# Altium PCB BenchSignalGenerator.PcbDoc (part 3 of 3)
Units mm, origin at the board's own origin, x right, y up, seen from the top; angles counter-clockwise.
Board outline 98.17 x 87.5 mm, 4 copper layers (Top Layer, Ground, 3.3, Bottom Layer), stack 0.603 mm thick; 75 components, 70 nets, 305 pads, 51 vias.
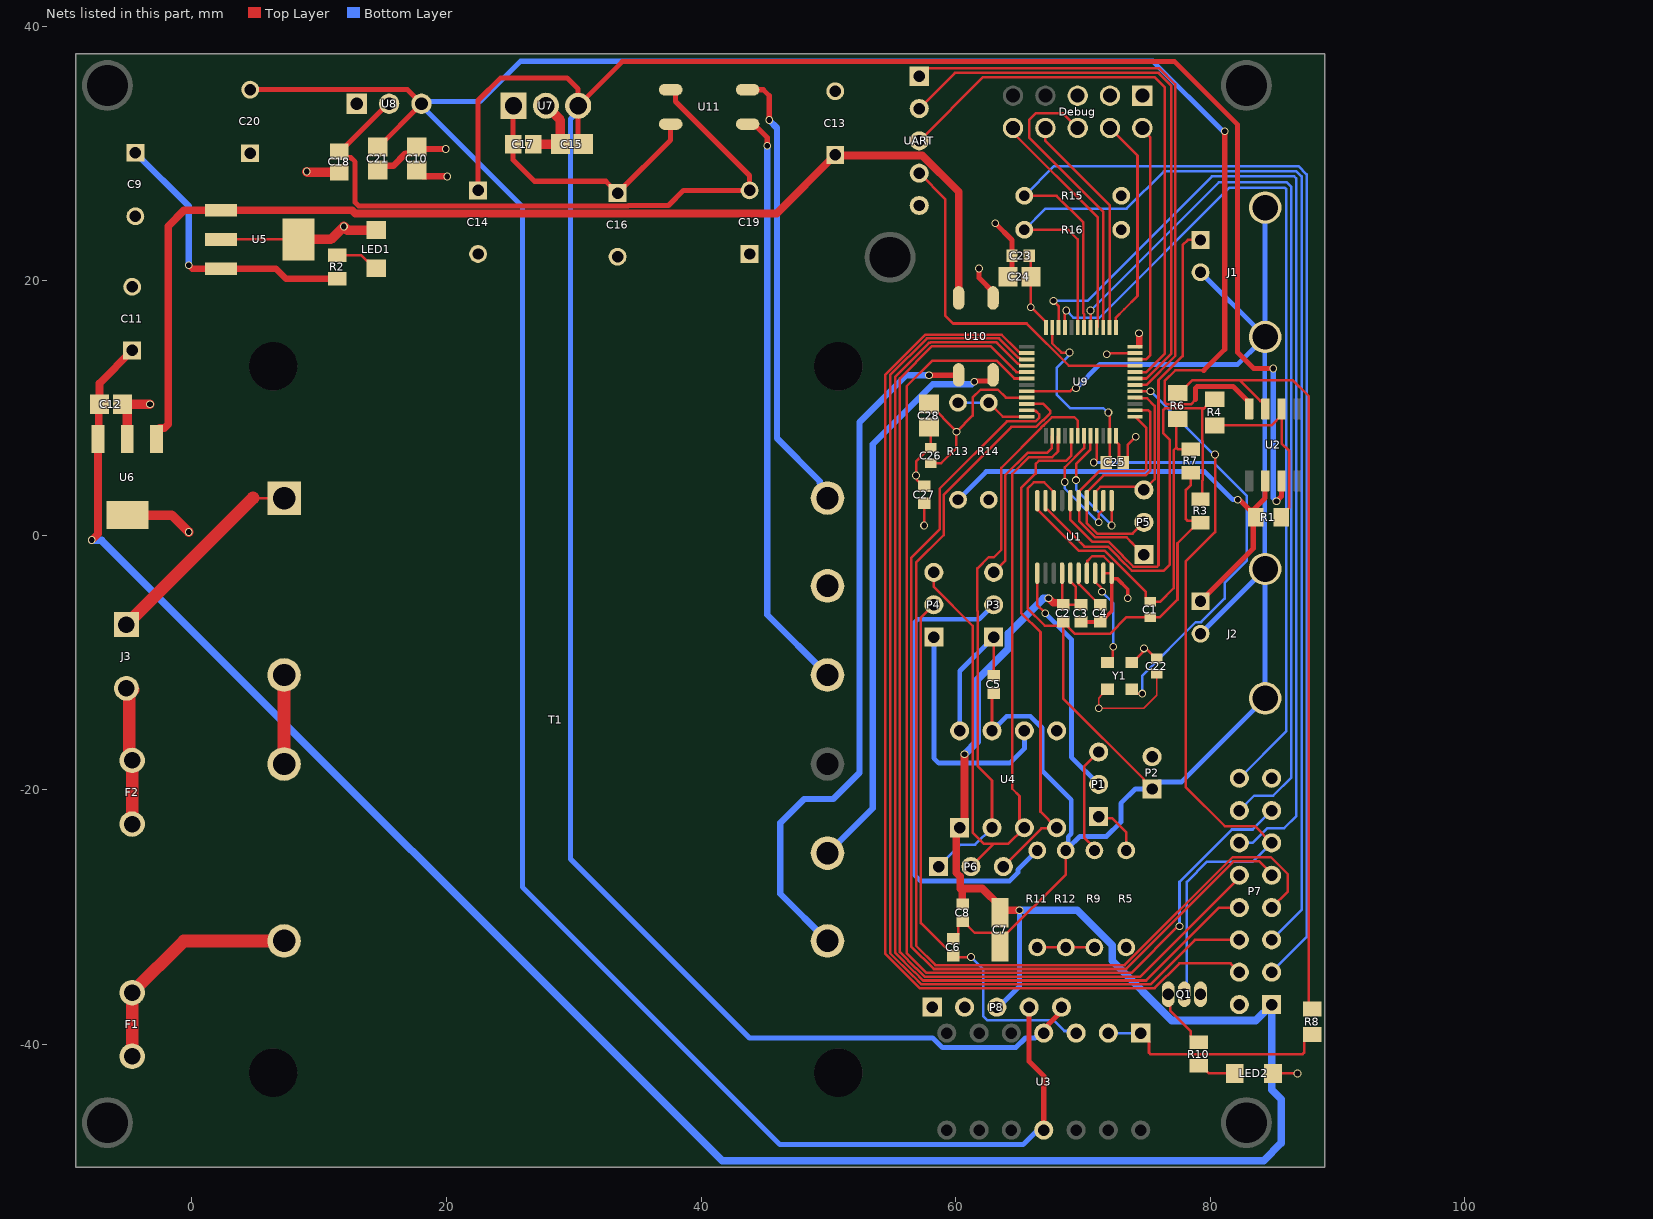
[diagram p4: the nets of this part, all layers, seen from the top]

## Via types
v1: diameter 0.61, hole 0.45, Top Layer to Bottom Layer, 51 vias

## Nets (pads, with @x,y where several pads share a name; then routed paths per layer and width w, separated by ;. In a path a pad name is that pad's centre, name@x,y a point inside that pad or via, vN(x,y) a via of type N, cw(c..) or ccw(c..) an arc to the next point about the centre after c; other vN are vias at no path point)
+3.3: C9.1 C10.2 C22.1 C23.1 C24.1 C25.2 C26.1 C27.2 C28.2 Debug.1 P7.2 P8.2 Q1.3 R2.1 R15.2 R16.2 U5.3 U9.9 U9.24 U9.36 U9.48 Y1.4 | length 62.4
  Top Layer w0.102: Y1.4@71.948,-12.112 71.898,-12.112 71.499,-12.511 71.499,-12.561 71.247,-12.813 v1(71.247,-13.602) 74.803,-13.602 75.819,-12.586 C22.1@75.819,-10.9
  Top Layer w0.2: v1(57.531,0.749) C27.2@57.531,2.487 C27.2@57.581,2.487 ; C28.2@57.912,10.285 57.937,10.285 60.071,8.151 v1(60.071,8.115) ; C26.1@58.039,5.645 58.871,5.645 60.059,6.833 60.059,8.103 v1(60.071,8.115) ; U9.9@65.6,10.802 65.596,10.798 63.951,10.798 63.947,10.794 63.324,11.417 61.966,11.417 61.341,10.792 61.341,9.385 v1(60.071,8.115) ; C23.1@65.786,21.958 65.922,21.822 65.922,20.309 C24.1@65.924,20.307 65.913,20.296 v1(65.913,17.894) 65.958,17.894 67.1,16.752 U9.48@67.1,16.302 ; U9.24@72.6,7.802 72.65,7.752 72.65,7.302 72.842,7.11 72.842,6.052 C25.2@73.192,5.702 73.542,6.052 73.542,7.108 v1(74.168,7.734)
  Top Layer w0.5: v1(-0.254,21.196) 0.014,20.928 U5.3@2.284,20.928 6.603,20.928 7.387,20.144 R2.1@11.43,20.144 ; C10.2@17.653,28.678 18.15,28.181 v1(20.066,28.181) ; U9.36@74.422,14.902 v1(74.422,15.862)
  Bottom Layer w0.5: C9.1@-4.445,30.046 -0.254,25.855 v1(-0.254,21.196)
+5: C2.2 C3.2 C7.1 C8.2 C11.1 C12.2 P7.1 P8.3 U1.4 U1.5 U4.1 U6.3 | length 215.9
  Top Layer w0.2: U1.4@68.367,-2.99 68.367,-5.388 C2.2@68.453,-5.474 68.463,-5.483 69.84,-5.483 C3.2@69.85,-5.474 69.8,-5.474 69.45,-5.124 69.45,-4.098 69.017,-3.665 U1.5@69.017,-2.99
  Top Layer w0.6: v1(-7.874,-0.394) -7.38,0.1 U6.3@-7.38,7.559 -7.321,7.619 -7.321,10.215 C12.2@-7.261,10.274 -7.261,11.943 C11.1@-4.699,14.505 ; 60.368,-27.771 60.368,-26.83 60.062,-26.525 60.062,-23.262 U4.1@60.325,-23 60.706,-22.619 v1(60.706,-17.226) ; 60.452,-27.771 60.525,-27.771 ; C8.2@60.567,-29.009 60.525,-28.967 60.525,-27.771 ; C7.1@63.5,-29.676 C7.1@63.5,-29.176 ; v1(65.024,-29.477) 63.801,-29.477 C7.1@63.5,-29.176 ; v1(67.31,-4.966) 67.668,-5.324 68.303,-5.324 C2.2@68.367,-5.388 ; 60.525,-27.771 62.095,-27.771 C7.1@63.5,-29.176
  Bottom Layer w0.102: P8.3@63.246,-37.097 P8.3@63.373,-37.097
  Bottom Layer w0.4: P8.3@63.373,-37.097 65.024,-35.446 v1(65.024,-29.477)
  Bottom Layer w0.6: v1(-7.874,-0.394) -7.112,-0.394 41.656,-49.162 84.201,-49.162 85.598,-47.765 85.598,-44.336 84.836,-43.574 P7.1@84.836,-36.888 83.583,-38.141 76.993,-38.141 72.304,-33.452 72.304,-32.236 69.545,-29.477 v1(65.024,-29.477) ; v1(60.706,-17.226) 61.713,-16.219 61.713,-11.36 64.144,-8.93 64.144,-7.736 66.914,-4.966 v1(67.31,-4.966)
+12: C14.1 C15.2 P8.5 U2.7 U3.4 U7.3 | length 215.2
  Top Layer w0.102: U3.4@66.929,-39.129 U3.4@66.929,-38.811 ; P8.5@68.326,-37.414 P8.5@68.326,-37.097
  Top Layer w0.4: C14.1@22.479,27.085 22.479,34.15 24.257,35.928 29.464,35.928 30.33,35.062 30.33,33.755 U7.3@30.348,33.737 ; C15.2@30.745,30.721 30.348,31.118 U7.3@30.348,33.737 ; U3.4@66.929,-38.811 P8.5@68.326,-37.414 ; v1(84.963,13.081) 83.426,13.081 82.169,14.338 82.169,32.245 77.216,37.198 33.809,37.198 U7.3@30.348,33.737 ; v1(85.217,2.654) 85.614,3.051 U2.7@85.614,4.264
  Bottom Layer w0.4: U7.3@30.348,33.737 30.348,33.291 29.753,32.696 29.753,-25.448 43.815,-39.51 58.203,-39.51 58.965,-40.272 64.733,-40.272 65.495,-39.51 66.25,-39.51 66.631,-39.129 U3.4@66.929,-39.129 ; v1(84.963,13.081) 84.963,2.908 v1(85.217,2.654)
-12: C20.2 C21.2 P8.4 U2.4 U3.11 U8.3 | length 243.7
  Top Layer w0.2: 78.867,10.655 78.487,10.275 76.58,10.275 76.454,10.401 76.454,12.134 77.262,12.941 79.502,12.941
  Top Layer w0.4: C20.2@4.572,34.999 16.931,34.999 U8.3@18.034,33.896 18.034,33.882 14.63,30.478 C21.2@14.605,30.478 ; P8.4@65.786,-37.097 65.786,-41.365 66.929,-42.508 U3.11@66.929,-46.749 ; 78.867,10.655 78.867,11.554 78.984,11.671 81.816,11.671 83.074,10.413 U2.4@83.074,9.913 ; 79.502,12.941 81.153,14.592 v1(81.153,31.737)
  Bottom Layer w0.4: U3.11@66.929,-46.749 66.719,-46.959 66.239,-46.959 65.297,-47.902 46.209,-47.902 25.972,-27.664 25.972,25.803 18.034,33.74 U8.3@18.034,33.896 18.196,34.058 22.641,34.058 25.816,37.233 75.502,37.233 80.988,31.747 81.143,31.747 v1(81.153,31.737)
GND: C3.1 C4.1 C9.2 C10.1 C11.2 C12.1 C13.2 C14.2 C15.1 C16.2 C17.1 C18.1 C19.1 C20.1 C21.1 C22.2 C23.2 C24.2 C25.1 C26.2 C27.1 C28.1 Debug.3 Debug.5 LED1.1 LED2.1 P2.2 P7.15 P8.1 R5.2 R14.1 T1.8 U1.7 U1.9 U1.10 U4.5 U5.2 U5.4 U6.2 U6.4 U7.2 U8.1 U9.23 U9.35 U9.47 U10.3 UART.5 Y1.2 | length 85.7
  Top Layer w0.2: U5.2@2.284,23.228 U5.4@8.384,23.228 ; C27.1@57.531,3.837 57.481,3.837 56.944,4.374 56.944,4.638 v1(56.896,4.686) 56.896,5.777 57.964,6.845 C26.2@58.039,6.845 58.039,8.358 C28.1@57.912,8.485 ; U9.47@67.6,16.302 67.6,15.064 68.326,14.338 v1(68.961,14.338) ; U1.7@70.317,-2.99 70.346,-2.961 70.346,-2.18 70.366,-2.16 70.366,-2.037 70.739,-1.664 71.638,-1.664 72.267,-2.293 U1.10@72.267,-2.99 U1.9@71.617,-2.99 ; C25.1@71.842,5.702 72.1,5.96 U9.23@72.1,7.802 72.1,9.481 72.009,9.572 v1(72.009,9.639) ; v1(71.882,14.211) 71.95,14.211 72.041,14.302 U9.35@74.1,14.302 ; Y1.2@73.848,-10.012 73.898,-10.012 74.755,-9.155 74.755,-8.951 v1(74.803,-8.903) 74.851,-8.951 74.995,-8.951 75.744,-9.7 C22.2@75.819,-9.7 ; LED2.1@84.939,-42.304 v1(86.868,-42.304)
  Top Layer w0.3: C3.1@69.85,-6.824 C4.1@71.374,-6.824 71.424,-6.824 72.267,-5.981 U1.10@72.267,-3.439 ; U1.10@72.267,-2.99 72.267,-3.416 72.29,-3.439 72.716,-3.439 73.533,-4.256 v1(73.533,-4.966)
  Top Layer w0.4: v1(61.849,20.942) 61.859,20.933 61.859,20.195 62.945,19.108 U10.3@62.945,18.633 ; v1(63.119,24.498) 64.436,23.181 C23.2@64.436,21.958 64.436,20.619 C24.2@64.124,20.307
  Top Layer w0.5: C21.1@14.605,28.678 14.959,29.032 15.837,29.032 16.783,29.978 17.153,29.978 C10.1@17.653,30.478 17.791,30.34 v1(19.939,30.34)
  Top Layer w0.75: U6.4@-5.08,1.559 -1.572,1.559 v1(-0.254,0.241) ; U6.2@-5.08,7.559 -5.08,9.435 -5.086,9.441 -5.086,9.899 C12.1@-5.461,10.274 v1(-3.302,10.274) ; U5.4@8.384,23.228 10.922,23.228 v1(11.938,24.244) 12.216,23.966 LED1.1@14.478,23.966 ; v1(9.017,28.562) 9.055,28.524 C18.1@11.557,28.524 ; C17.1@26.835,30.721 C15.1@28.945,30.721 28.945,32.605 U7.2@27.813,33.737
  Bottom Layer w0.2: v1(68.961,14.338) 68.913,14.29 68.913,14.11 67.945,13.142 67.945,11.036 69.006,9.976 71.605,9.976 71.941,9.639 v1(72.009,9.639)
GND_A: C1.2 C2.1 C5.1 C6.1 C7.2 C8.1 J1.2 J1.MH1 J1.MH2 J2.2 J2.MH1 J2.MH2 P2.1 R3.2 R7.1 R12.1 U1.18 U4.7 U9.8 | length 183.3
  Top Layer w0.2: C6.1@59.817,-31.723 59.867,-31.723 60.217,-31.373 60.217,-30.709 C8.1@60.567,-30.359 60.617,-30.359 61.509,-31.251 62.925,-31.251 C7.2@63.5,-31.826 ; U4.7@62.865,-15.38 62.865,-12.539 C5.1@62.992,-12.412 ; U9.8@65.6,11.302 65.612,11.29 68.999,11.29 69.253,11.544 v1(69.469,11.544) ; U1.18@67.717,2.71 67.717,3.385 66.953,4.149 66.157,4.149 65.659,3.651 65.659,-5.766 67.018,-7.125 68.152,-7.125 C2.1@68.453,-6.824 ; R12.1@68.665,-24.778 68.665,-26.661 C7.2@63.5,-31.826 ; P2.1@75.438,-19.952 74.788,-19.302 74.788,-19.175 68.453,-12.84 C2.1@68.453,-6.824 ; R7.1@78.486,4.904 78.486,3.924 78.105,3.543 78.105,1.247 78.222,1.13 78.885,1.13 78.985,1.031 R3.2@79.048,0.967 ; R3.2@79.248,0.967 R3.2@79.048,0.967 ; C7.2@63.5,-31.826 C7.2@63.5,-32.326 C7.2@63.5,-31.826 ; C2.1@68.453,-6.824 68.503,-6.824 68.853,-7.174 68.853,-7.224 69.389,-7.76 72.136,-7.76 73.441,-6.455 76.061,-6.455 77.438,-5.078 77.438,-0.643 R3.2@79.048,0.967
  Bottom Layer w0.381: U4.7@62.865,-15.38 64.009,-14.236 65.879,-14.236 66.801,-15.159 66.801,-18.52 69.089,-20.807 69.089,-23.473 68.86,-23.703 R12.1@68.86,-24.583 ; R12.1@68.665,-24.778 R12.1@68.86,-24.583 ; v1(69.469,11.544) 71.333,13.409 82.167,13.409 J1.MH2@83.966,15.208 ; J2.2@79.248,-7.747 J2.MH1@84.328,-2.667 ; J1.2@79.248,20.65 83.966,15.932 J1.MH2@83.966,15.208 ; J1.MH1@84.328,25.73 J1.MH2@84.328,15.57 ; R12.1@68.86,-24.583 69.758,-23.684 71.857,-23.684 72.987,-22.555 72.987,-21.081 74.116,-19.952 P2.1@75.438,-19.952 75.998,-19.392 77.763,-19.392 J2.MH2@84.328,-12.827 J2.MH1@84.328,-2.667 ; J1.MH2@83.966,15.208 J1.MH2@84.328,15.57 ; J2.MH1@84.328,-2.667 84.297,-2.636 84.297,15.539 J1.MH2@84.328,15.57
NetC1_1: C1.1 R6.1 R7.2 U1.20 | length 31.3
  Top Layer w0.2: R6.1@77.47,9.122 77.344,8.996 77.344,6.871 ; R7.2@78.486,6.754 77.461,6.754 77.344,6.871 ; U1.20@66.417,2.71 U1.20@66.466,2.759 ; U1.20@66.417,2.71 U1.20@66.466,2.759 ; U1.20@66.417,2.71 66.466,2.661 66.466,1.986 69.697,-1.245 71.73,-1.245 74.961,-4.476 74.961,-4.98 75.236,-5.255 76.061,-5.255 77.137,-4.179 77.137,6.664 77.344,6.871 ; U1.20@66.466,2.759 66.466,3.434 U1.20@66.466,2.759
NetC4_2: C4.2 U1.6 | length 3.2
  Top Layer w0.2: U1.6@69.667,-2.99 69.696,-3.018 69.696,-3.845 71.324,-5.474 C4.2@71.374,-5.474
NetC5_2: C5.2 P3.1 U4.8 | length 11.5
  Top Layer w0.2: C5.2@62.992,-11.062 P3.1@62.992,-8.014
  Bottom Layer w0.381: U4.8@60.325,-15.38 60.325,-10.681 P3.1@62.992,-8.014
NetC6_2: C6.2 P4.2 U3.3 | length 43.6
  Top Layer w0.2: P4.2@58.293,-5.474 57.277,-6.49 57.277,-30.483 59.867,-33.073 C6.2@59.817,-33.073 59.904,-33.16 v1(61.214,-33.16) ; U3.3@69.358,-39.018 U3.3@69.469,-39.129
  Bottom Layer w0.2: v1(61.214,-33.16) 62.16,-34.106 62.16,-37.789 62.484,-38.113 67.691,-38.113 68.546,-38.967 69.308,-38.967 U3.3@69.469,-39.129
NetC13_1: C13.1 U5.1 U6.1 U10.4 | length 91.5
  Top Layer w0.6: U6.1@-2.78,7.559 -2.78,8.159 -2.53,8.409 -2.167,8.409 -1.874,8.702 -1.874,24.277 -0.623,25.528 U5.1@2.284,25.528 3.034,25.528 12.578,25.528 12.838,25.268 45.942,25.268 C13.1@50.546,29.872 50.595,29.824 57.39,29.824 60.245,26.969 U10.4@60.245,18.633
NetC16_1: C16.1 C17.2 U7.1 U11.4 | length 20.7
  Top Layer w0.4: U7.1@25.278,33.737 25.235,33.694 25.235,29.489 26.924,27.8 32.512,27.8 C16.1@33.441,26.871 37.615,31.045 U11.4@37.615,32.292
NetC18_2: C18.2 C19.2 U8.2 U11.3 | length 52.4
  Top Layer w0.4: U8.2@15.494,33.896 15.404,33.896 11.632,30.124 C18.2@11.557,30.124 12.007,29.674 12.477,29.674 12.827,29.324 12.827,26.13 13.087,25.87 34.266,25.87 34.292,25.895 37.438,25.895 38.628,27.085 C19.2@43.815,27.085 43.815,28.244 37.99,34.069 37.99,34.669 37.667,34.992 U11.3@37.615,34.992
NetDebug_2: Debug.2 U9.34 | length 19.5
  Top Layer w0.2: U9.34@74.1,13.802 74.962,13.802 75.311,14.151 75.311,31.229 74.676,31.864 Debug.2@74.676,31.984
NetDebug_4: Debug.4 U9.37 | length 17.3
  Top Layer w0.2: Debug.4@72.136,31.984 74.295,29.825 74.295,18.783 73.255,17.743 72.6,17.088 U9.37@72.6,16.302
NetDebug_6: Debug.6 U9.39 | length 23.2
  Top Layer w0.2: Debug.6@69.596,31.984 68.446,33.134 66.294,33.134 65.786,32.626 65.786,31.229 71.6,25.415 U9.39@71.6,16.302
NetDebug_8: Debug.8 U9.38 | length 17.8
  Top Layer w0.2: Debug.8@67.056,31.984 67.056,30.975 72.1,25.931 U9.38@72.1,16.302
NetDebug_10: Debug.10 U9.40 | length 18.5
  Top Layer w0.2: Debug.10@64.516,31.984 64.516,31.61 71.187,24.939 71.187,16.389 U9.40@71.1,16.302
NetF1_1: F1.1 T1.6 | length 18.6
  Top Layer w1: F1.1@-4.699,-40.954 F1.1@-4.699,-35.954 -0.637,-31.892 T1.6@7.239,-31.892
NetF2_1: F2.1 J3.2 | length 11
  Top Layer w0.2: J3.2@-5.149,-12.038 J3.2@-4.924,-12.263 ; F2.1@-4.924,-17.481 F2.1@-4.699,-17.706
  Top Layer w1: F2.1@-4.924,-17.481 J3.2@-4.924,-12.263 ; F2.1@-4.699,-22.706 F2.1@-4.699,-17.706 ; J3.2@-4.699,-12.234 J3.2@-4.63,-12.165
NetJ1_1: J1.1 U1.16 | length 37.5
  Top Layer w0.2: U1.16@69.017,2.71 69.017,1.201 70.739,-0.521 72.02,-0.521 73.152,-1.653 73.152,-1.671 73.969,-2.488 75.829,-2.488 75.946,-2.371 75.946,12.179 77.838,14.071 77.838,22.78 78.248,23.19 J1.1@79.248,23.19
NetJ2_1: J2.1 R1.2 R13.2 U2.6 | length 36.7
  Top Layer w0.4: J2.1@79.248,-5.207 83.39,-1.065 83.39,1.192 R1.2@83.582,1.384 ; v1(82.169,2.781) 82.31,2.781 83.121,1.97 83.39,1.97 84.328,2.908 84.328,4.248 U2.6@84.344,4.264 ; R1.2@83.39,1.576 R1.2@83.39,1.817
  Bottom Layer w0.381: R13.2@60.198,2.781 62.4,4.984 79.586,4.984 81.788,2.781 v1(82.169,2.781)
NetJ3_1: J3.1 T1.1 | length 16.5
  Top Layer w0.2: 4.797,2.908 T1.1@7.239,2.908
  Top Layer w1: J3.1@-5.149,-7.038 4.797,2.908
NetLED1_2: LED1.2 R2.2 | length 3.5
  Top Layer w0.2: R2.2@11.43,21.994 13.299,21.994 13.727,21.566 13.878,21.566 LED1.2@14.478,20.966
NetLED2_2: LED2.2 R10.2 | length 3.1
  Top Layer w0.2: R10.2@79.121,-41.705 79.321,-41.705 79.92,-42.304 LED2.2@81.939,-42.304
NetP1_1: P1.1 R5.1 | length 4.1
  Top Layer w0.2: P1.1@71.247,-22.125 71.359,-22.238 72.297,-22.238 73.406,-23.347 R5.1@73.406,-24.778
NetP1_2: P1.2 U1.1 | length 18.6
  Top Layer w0.2: U1.1@66.417,-2.99 66.417,-5.496 v1(67.056,-6.135)
  Bottom Layer w0.381: v1(67.056,-6.135) 69.104,-8.183 69.104,-17.442 P1.2@71.247,-19.585
NetP1_3: P1.3 R9.1 | length 8.5
  Top Layer w0.2: R9.1@70.908,-24.778 70.908,-24.564 70.104,-23.76 70.104,-18.188 P1.3@71.247,-17.045
NetP3_2: P3.2 R11.2 | length 37.6
  Bottom Layer w0.381: 57.76,-27.191 57.277,-27.191 56.807,-26.72 56.807,-6.841 57.03,-6.617 61.848,-6.617 P3.2@62.992,-5.474 ; 57.761,-27.191 64.228,-27.191 64.898,-26.521 64.898,-26.301 R11.2@66.421,-24.778
NetP3_3: P3.3 U9.14 | length 13.5
  Top Layer w0.2: P3.3@62.992,-2.934 63.894,-2.032 63.894,4.699 65.659,6.464 67.17,6.464 67.564,6.858 67.564,7.766 U9.14@67.6,7.802
NetP4_1: P4.1 U4.6 | length 18.7
  Bottom Layer w0.381: P4.1@58.293,-8.014 58.293,-17.539 58.674,-17.92 64.262,-17.92 65.405,-16.777 U4.6@65.405,-15.38
NetP4_3: P4.3 P6.2 U4.3 U9.15 | length 63
  Top Layer w0.2: P4.3@58.293,-2.934 58.293,-4.077 61.341,-7.125 61.341,-23.381 62.23,-24.27 62.992,-24.27 ; P6.2@61.214,-26.048 62.992,-24.27 ; U9.15@68.1,7.802 68.05,7.752 68.05,6.582 67.599,6.131 65.771,6.131 64.453,4.813 64.453,-19.935 65.024,-20.505 65.024,-22.619 65.083,-22.677 U4.3@65.405,-23 64.135,-24.27 62.992,-24.27
NetP5_1: P5.1 U1.15 U9.25 | length 19
  Top Layer w0.2: U9.25@74.1,9.302 74.987,8.415 74.987,5.184 74.803,5.001 71.282,5.001 69.667,3.385 U1.15@69.667,2.71 69.696,2.682 69.696,1.9 69.716,1.88 69.716,1.092 70.995,-0.187 73.454,-0.187 73.879,-0.613 P5.1@74.803,-1.537
NetP5_2: P5.2 U1.14 U9.26 | length 19.2
  Top Layer w0.2: U9.26@74.1,9.802 75.159,9.802 75.289,9.672 75.289,5.045 74.93,4.686 71.618,4.686 70.317,3.385 U1.14@70.317,2.71 70.317,0.917 71.12,0.114 73.914,0.114 P5.2@74.803,1.003
NetP5_3: P5.3 U1.13 U9.28 | length 13.6
  Top Layer w0.2: U1.13@70.967,2.71 71.016,2.759 71.016,3.434 71.379,3.797 74.197,3.797 74.451,3.543 P5.3@74.803,3.543 75.644,4.385 75.644,10.149 75.041,10.752 74.15,10.752 U9.28@74.1,10.802
NetP6_1: P6.1 U4.2 U9.18 | length 44.2
  Top Layer w0.2: U4.2@62.865,-23 62.865,-19.289 61.757,-18.181 61.757,-5.989 61.722,-5.954 61.722,-2.622 62.603,-1.741 63.007,-1.741 63.592,-1.156 63.592,5.286 66.748,8.443 66.748,8.486 66.866,8.604 66.91,8.604 67.564,9.258 69.342,9.258 69.6,9 U9.18@69.6,7.802
  Bottom Layer w0.2: P6.1@58.674,-26.048 60.399,-24.323 61.542,-24.323 U4.2@62.865,-23
NetP6_3: P6.3 U4.4 U9.17 | length 40.3
  Top Layer w0.2: P6.3@63.754,-26.048 66.755,-23.047 67.898,-23.047 U4.4@67.945,-23 66.675,-21.73 66.675,-7.633 65.151,-6.109 65.151,3.683 66.294,4.826 66.294,5.588 66.535,5.829 68.661,5.829 69.096,6.264 69.096,7.798 U9.17@69.1,7.802
NetP7_3: P7.3 R15.1 U9.42 | length 101
  Top Layer w0.2: R15.1@65.405,26.657 67.945,26.657 70.037,24.565 70.037,17.415 70.104,17.348 70.104,16.306 U9.42@70.1,16.302
  Bottom Layer w0.2: R15.1@65.405,26.657 67.735,28.988 86.948,28.988 87.592,28.344 87.592,-31.592 P7.3@84.836,-34.348
NetP7_4: P7.4 U9.2 | length 88.6
  Top Layer w0.2: 64.798,14.569 65.015,14.352 65.55,14.352 U9.2@65.6,14.302 ; 64.798,14.569 63.632,15.735 63.558,15.735 63.543,15.751 57.628,15.751 54.483,12.606 54.483,-32.903 57.185,-35.604 75.648,-35.604 77.595,-33.657 81.605,-33.657 P7.4@82.296,-34.348
NetP7_5: P7.5 R16.1 U9.43 | length 96.2
  Top Layer w0.2: R16.1@65.405,23.99 68.834,23.99 69.6,23.224 U9.43@69.6,16.302
  Bottom Layer w0.2: R16.1@65.405,23.99 67.069,25.654 73.441,25.654 76.371,28.584 86.781,28.584 87.189,28.177 87.189,-29.455 P7.5@84.836,-31.808
NetP7_6: P7.6 U9.3 | length 87.9
  Top Layer w0.2: U9.3@65.6,13.802 65.15,13.802 65.002,13.951 64.917,13.951 63.418,15.449 57.753,15.449 54.864,12.56 54.864,-32.857 56.659,-34.652 56.676,-34.652 57.327,-35.303 75.314,-35.303 78.809,-31.808 P7.6@82.296,-31.808
NetP7_7: P7.7 U9.10 | length 86.7
  Top Layer w0.2: U9.10@65.6,10.302 66.901,10.302 67.458,9.745 67.458,9.579 66.917,9.038 66.874,9.038 66.332,8.496 64.389,8.496 59.055,3.162 59.055,-0.013 56.896,-2.172 56.896,-32.271 58.42,-33.795 73.284,-33.795 81.764,-25.315 84.769,-25.315 86.106,-26.652 86.106,-27.998 P7.7@84.836,-29.268
NetP7_8: P7.8 U9.4 | length 87.8
  Top Layer w0.2: U9.4@65.6,13.302 65.15,13.302 65.002,13.451 64.917,13.451 63.267,15.1 63.249,15.1 63.202,15.148 58.041,15.148 57.993,15.1 57.912,15.1 55.245,12.433 55.245,-32.812 56.784,-34.35 56.801,-34.35 57.452,-35.001 74.981,-35.001 80.714,-29.268 P7.8@82.296,-29.268
NetP7_9: P7.9 U9.11 | length 81.5
  Top Layer w0.2: U9.11@65.6,9.802 65.65,9.752 66.288,9.752 66.337,9.704 66.355,9.704 66.566,9.492 66.566,9.212 66.281,8.927 64.034,8.927 58.745,3.639 58.745,0.446 56.515,-1.784 56.515,-32.316 58.295,-34.096 73.409,-34.096 81.889,-25.617 83.846,-25.617 84.836,-26.607 P7.9@84.836,-26.728
NetP7_10: P7.10 U9.5 | length 87.8
  Top Layer w0.2: U9.5@65.6,12.802 64.785,12.802 64.551,13.037 62.741,14.846 58.166,14.846 55.626,12.306 55.626,-32.766 56.909,-34.049 56.926,-34.049 57.577,-34.7 74.52,-34.7 82.296,-26.924 P7.10@82.296,-26.728
NetP7_11: P7.11 Q1.2 U9.29 | length 60.8
  Top Layer w0.2: U9.29@74.1,11.302 74.106,11.296 75.304,11.296 v1(75.311,11.303) ; v1(80.391,6.337) 80.391,0.241 78.105,-2.045 78.105,-19.825 81.153,-22.873 83.521,-22.873 P7.11@84.836,-24.188
  Bottom Layer w0.2: v1(75.311,11.303) 80.277,6.337 v1(80.391,6.337) ; Q1.2@77.978,-36.081 78.172,-35.887 78.172,-27.251 79.756,-25.667 83.357,-25.667 P7.11@84.836,-24.188
NetP7_12: P7.12 U9.46 | length 80.9
  Top Layer w0.2: v1(67.691,18.402) 68.1,17.993 U9.46@68.1,16.302
  Bottom Layer w0.2: v1(67.691,18.402) 70.358,18.402 80.137,28.181 86.614,28.181 86.785,28.01 86.785,-22.066 85.827,-23.025 84.509,-23.025 83.347,-24.188 P7.12@82.296,-24.188
NetP7_13: P7.13 U9.6 | length 92
  Top Layer w0.2: U9.6@65.6,12.302 64.623,12.302 63.215,13.71 58.173,13.71 56.157,11.695 56.157,-32.854 57.702,-34.398 73.819,-34.398 77.483,-30.734 v1(77.597,-30.734)
  Bottom Layer w0.2: v1(77.597,-30.734) 77.597,-27.256 81.718,-23.135 83.349,-23.135 P7.13@84.836,-21.648
NetP7_14: P7.14 U9.41 | length 73
  Top Layer w0.2: U9.41@70.6,16.302 70.612,16.314 v1(70.612,17.653)
  Bottom Layer w0.2: v1(70.612,17.653) 70.625,17.653 80.683,27.711 86.029,27.711 86.382,27.358 86.382,-19.051 84.962,-20.472 83.472,-20.472 P7.14@82.296,-21.648
NetP7_16: P7.16 U9.45 | length 71
  Top Layer w0.2: U9.45@68.6,16.302 68.59,16.312 68.59,17.523 v1(68.707,17.64)
  Bottom Layer w0.2: v1(68.707,17.64) 69.269,17.078 71.307,17.078 81.537,27.308 85.862,27.308 85.979,27.191 85.979,-15.425 P7.16@82.296,-19.108
NetQ1_1: Q1.1 R10.1 | length 4.9
  Top Layer w0.2: Q1.1@76.708,-36.081 76.861,-36.234 76.861,-37.373 78.496,-39.007 78.496,-39.43 78.921,-39.855 R10.1@79.121,-39.855
NetR1_1: R1.1 R4.2 U2.2 | length 14.6
  Top Layer w0.2: R4.2@80.374,8.623 84.823,8.623 U2.2@85.614,9.413 ; R1.1@85.582,1.384 85.582,1.509 86.233,2.16 86.233,6.591 85.614,7.211 U2.2@85.614,9.413 ; U2.2@85.614,9.913 U2.2@85.614,9.413
NetR3_1: R3.1 R4.1 U1.19 | length 36.7
  Top Layer w0.2: U1.19@67.067,2.71 67.067,2.076 67.136,2.007 67.213,2.007 70.121,-0.902 71.974,-0.902 72.85,-1.778 72.85,-1.796 73.845,-2.79 74.024,-2.79 74.041,-2.807 76.327,-2.807 76.835,-2.299 76.835,7.48 76.327,7.988 76.327,9.832 76.444,9.949 79.527,9.949 ; R3.1@79.248,2.817 79.375,2.944 79.375,4.258 79.413,4.296 79.413,7.363 79.375,7.4 79.375,9.824 79.513,9.962 79.63,10.079 79.699,10.148 80.224,10.673 R4.1@80.374,10.673
NetR6_2: R6.2 R8.2 U2.3 | length 62.7
  Top Layer w0.2: R6.2@77.47,11.172 77.62,11.172 78.627,12.179 82.296,12.179 ; U2.3@84.344,9.913 84.344,10.297 84.119,10.522 83.953,10.522 82.296,12.179 ; R8.2@88.011,-37.24 87.757,-36.986 87.757,10.909 86.487,12.179 82.296,12.179
NetR8_1: R8.1 U3.1 U3.2 | length 18.5
  Top Layer w0.2: U3.2@72.009,-39.256 U3.2@72.009,-39.129 ; U3.1@74.549,-39.129 75.199,-39.779 75.199,-40.663 75.316,-40.78 87.269,-40.78 87.386,-40.663 87.386,-39.74 87.886,-39.24 R8.1@88.011,-39.24
  Bottom Layer w0.2: U3.2@72.009,-39.129 U3.1@74.549,-39.129
NetR9_2: R9.2 R11.1 R12.2 | length 4.5
  Top Layer w0.2: R11.1@66.421,-32.398 R12.2@68.665,-32.398 R9.2@70.908,-32.398
NetR13_1: R13.1 R14.2 U9.12 | length 5.9
  Top Layer w0.2: R14.2@62.611,10.401 63.71,9.302 U9.12@65.6,9.302
  Bottom Layer w0.2: R13.1@60.198,10.401 R14.2@62.611,10.401
NetT1_3: T1.3 T1.4 | length 7
  Top Layer w1: T1.4@7.239,-17.992 T1.3@7.239,-10.992
NetT1_7: T1.7 U11.2 | length 35.4
  Top Layer w0.4: U11.2@43.665,34.992 44.89,34.992 45.359,34.523 v1(45.359,32.606)
  Bottom Layer w0.5: v1(45.359,32.606) 45.974,31.991 45.974,7.596 49.337,4.233 49.337,4.09 49.939,3.487 T1.7@49.939,2.908
NetT1_9: T1.9 U11.1 | length 46.2
  Top Layer w0.4: U11.1@43.665,32.292 44.14,32.292 45.202,31.23 45.202,30.604 v1(45.212,30.594)
  Bottom Layer w0.5: v1(45.212,30.594) 45.212,-6.265 T1.9@49.939,-10.992
NetT1_11: T1.11 U10.2 | length 45.4
  Top Layer w0.4: v1(61.468,12.052) 61.516,12.1 62.622,12.1 62.945,12.423 U10.2@62.945,12.583
  Bottom Layer w0.5: T1.11@49.939,-24.992 49.96,-24.992 53.487,-21.464 53.487,7.141 58.203,11.857 61.273,11.857 v1(61.468,12.052)
NetT1_12: T1.12 U10.1 | length 55.6
  Top Layer w0.2: U10.1@60.222,12.56 U10.1@60.245,12.583
  Top Layer w0.4: v1(57.912,12.56) U10.1@60.222,12.56
  Bottom Layer w0.5: T1.12@49.939,-31.892 46.228,-28.181 46.228,-22.619 48.106,-20.741 50.392,-20.741 52.451,-18.682 52.451,8.877 56.134,12.56 v1(57.912,12.56)
NetU1_8: U1.8 Y1.3 | length 7.8
  Top Layer w0.2: U1.8@70.967,-2.99 71.016,-3.039 71.016,-3.714 71.453,-4.151 71.453,-4.41 v1(71.501,-4.458) ; Y1.3@71.948,-10.012 71.998,-10.012 72.348,-9.662 72.348,-8.818 v1(72.39,-8.776)
  Bottom Layer w0.2: v1(71.501,-4.458) 72.39,-5.347 v1(72.39,-8.776)
NetU1_11: U1.11 U9.20 | length 10.6
  Top Layer w0.2: v1(69.469,4.318) 69.469,5.591 70.6,6.722 U9.20@70.6,7.802 ; v1(72.263,0.749) 72.265,0.751 72.265,2.708 U1.11@72.267,2.71
  Bottom Layer w0.2: v1(69.469,4.318) 69.469,3.594 72.263,0.8 v1(72.263,0.749)
NetU1_12: U1.12 U9.19 | length 10.4
  Top Layer w0.2: v1(68.58,4.178) 68.58,5.321 70.1,6.841 U9.19@70.1,7.802 ; v1(71.247,1.003) 71.247,1.638 71.617,2.008 U1.12@71.617,2.71
  Bottom Layer w0.2: v1(68.58,4.178) 68.58,3.67 v1(71.247,1.003)
NetU9_21: U9.21 Y1.1 | length 35.5
  Top Layer w0.2: v1(70.866,5.702) 71.1,5.936 U9.21@71.1,7.802 ; Y1.1@73.848,-12.112 74.195,-12.459 v1(74.676,-12.459)
  Bottom Layer w0.2: v1(70.866,5.702) 80.276,5.702 82.896,3.082 82.896,-2.011 81.146,-3.761 81.146,-4.994 79.295,-6.845 78.875,-6.845 74.676,-11.044 v1(74.676,-12.459)
NetU9_30: U9.30 UART.1 | length 46.4
  Top Layer w0.2: UART.1@57.15,36.055 57.785,36.69 75.992,36.69 77.264,35.418 77.264,14.074 74.991,11.802 U9.30@74.1,11.802
NetU9_31: U9.31 UART.2 | length 46.1
  Top Layer w0.2: UART.2@57.15,33.515 59.944,36.309 75.946,36.309 76.962,35.293 76.962,14.264 75,12.302 U9.31@74.1,12.302
NetU9_32: U9.32 UART.3 | length 45.6
  Top Layer w0.2: UART.3@57.15,30.975 62.158,35.983 75.637,35.983 76.454,35.166 76.454,14.256 75,12.802 U9.32@74.1,12.802
NetU9_33: U9.33 UART.4 | length 28.6
  Top Layer w0.2: UART.4@57.15,28.435 59.182,26.403 59.182,17.259 59.817,16.624 65.577,16.624 68.899,13.302 U9.33@74.1,13.302
pads on no net: Debug.7 Debug.9 T1. T1.10 U1.2 U1.3 U1.17 U2.1 U2.5 U2.8 U3.5 U3.6 U3.7 U3.8 U3.9 U3.10 U3.12 U3.13 U3.14 U9.1 U9.7 U9.13 U9.16 U9.22 U9.27 U9.44

## Polygon pours and split planes (outlines as drawn)
GND on Ground (split plane): 88.517,-49.159 -8.634,-49.159 -8.634,-30.49 -8.382,-43.193 1.397,-43.193 10.033,-35.81 10.033,5.575 6.731,5.575 -0.381,-1.537 -8.634,-1.537 -8.634,37.323 88.517,37.323
+3.3 on 3.3 (split plane): 88.517,-49.159 -8.634,-49.159 -8.634,-30.553 -8.382,-43.256 1.397,-43.256 10.033,-35.874 10.033,5.512 6.731,5.512 -0.381,-1.6 -8.634,-1.6 -8.634,37.323 88.517,37.323

## Other copper
Ground (plane layer: these items are gaps in the copper):
  pour cut-out: -8.747,-1.537 -0.381,-1.537 6.731,5.575 10.033,5.575 10.033,-35.81 1.397,-43.193 -8.382,-43.193 -9.144,-4.712
3.3 (plane layer: these items are gaps in the copper):
  pour cut-out: -8.747,-1.6 -0.381,-1.6 6.731,5.512 10.033,5.512 10.033,-35.874 1.397,-43.256 -8.382,-43.256 -9.144,-4.775

## Silkscreen, mask and mechanical layers (free items; w line width, h text height)
Top Overlay:
  text "Mosi" at 74.014,5.04 h1
  text "CLK" at 75.665,0.722 h1
  text "CS" at 73.76,-3.596 h1
  text "CS" at 57.504,-24.805 h1
  text "Mosi" at 61.949,-24.932 h1
  text "CLK" at 59.79,-27.853 h1
  text "G" at 57.631,-35.473 h1
  text "3.3" at 59.409,-35.473 h1
  text "5" at 62.838,-35.473 h1
  text "-12" at 64.235,-35.473 h1
  text "+12" at 67.537,-35.473 h1
Bottom Overlay:
  text "Bench Signal Generator / by Scott Hanson /  / MCU: STM32L433CC / DDS: AD9834 / DAC: MCP4812 /  / V1.00  - October 2020" at 37.592,-10.554 h1

## Text inside footprints (layer, text, board x,y; h text height)
C9: Top Overlay "+" at -7.239,30.213 h0.7 r270
C11: Top Overlay "+" at -2.286,12.941 h0.7 r90
C13: Top Overlay "+" at 53.086,29.324 h0.7 r90
C14: Top Overlay "+" at 20.701,27.887 h0.7 r270
C16: Top Overlay "+" at 31.536,27.419 h0.7 r270
C19: Top Overlay "+" at 42.926,27.292 h0.7 r90
C20: Top Overlay "+" at 5.322,25.95 h0.7 r90
Debug: Top Overlay "1" at 76.236,35.054 h0.7 r180; Top Overlay "2" at 76.536,32.514 h0.7 r180; Top Overlay "10" at 63.256,32.454 h0.7 r180; Top Overlay "9" at 63.256,34.994 h0.7 r180
P7: Top Overlay "2" at 82.804,-39.428 h0.7 r90; Top Overlay "1" at 85.344,-39.428 h0.7 r90; Top Overlay "15" at 85.344,-17.584 h0.7 r90; Top Overlay "16" at 82.804,-17.584 h0.7 r90